# Altium PCB CROSS.PcbDoc
Units mm, origin at the board's own origin, x right, y up, seen from the top; angles counter-clockwise.
Board outline 150.9 x 121.4 mm, 2 copper layers (Top Layer, Bottom Layer); 17 components, 49 nets, 155 pads, 10 vias.
Unrouted connection lines stored in the file: 3.
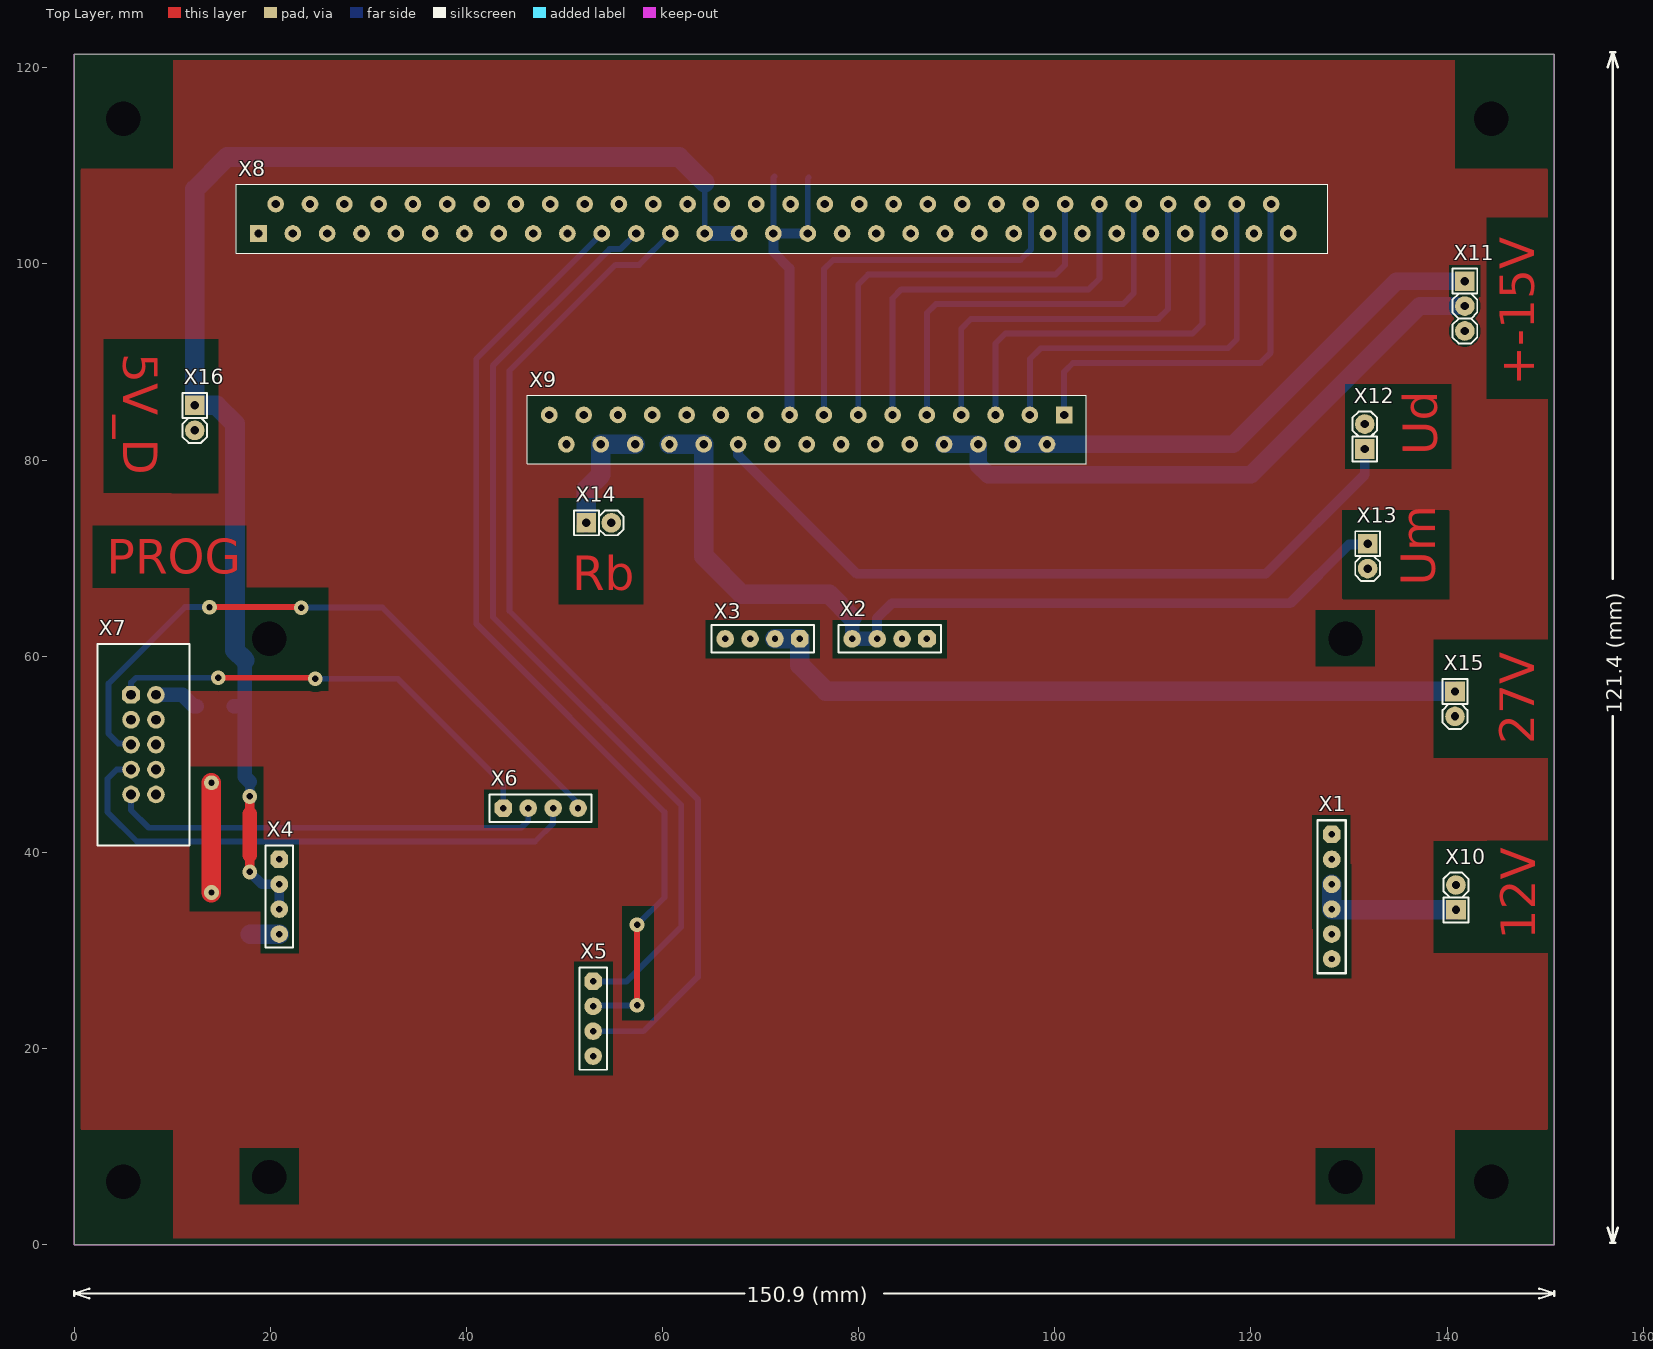
[diagram p0: Top Layer view]
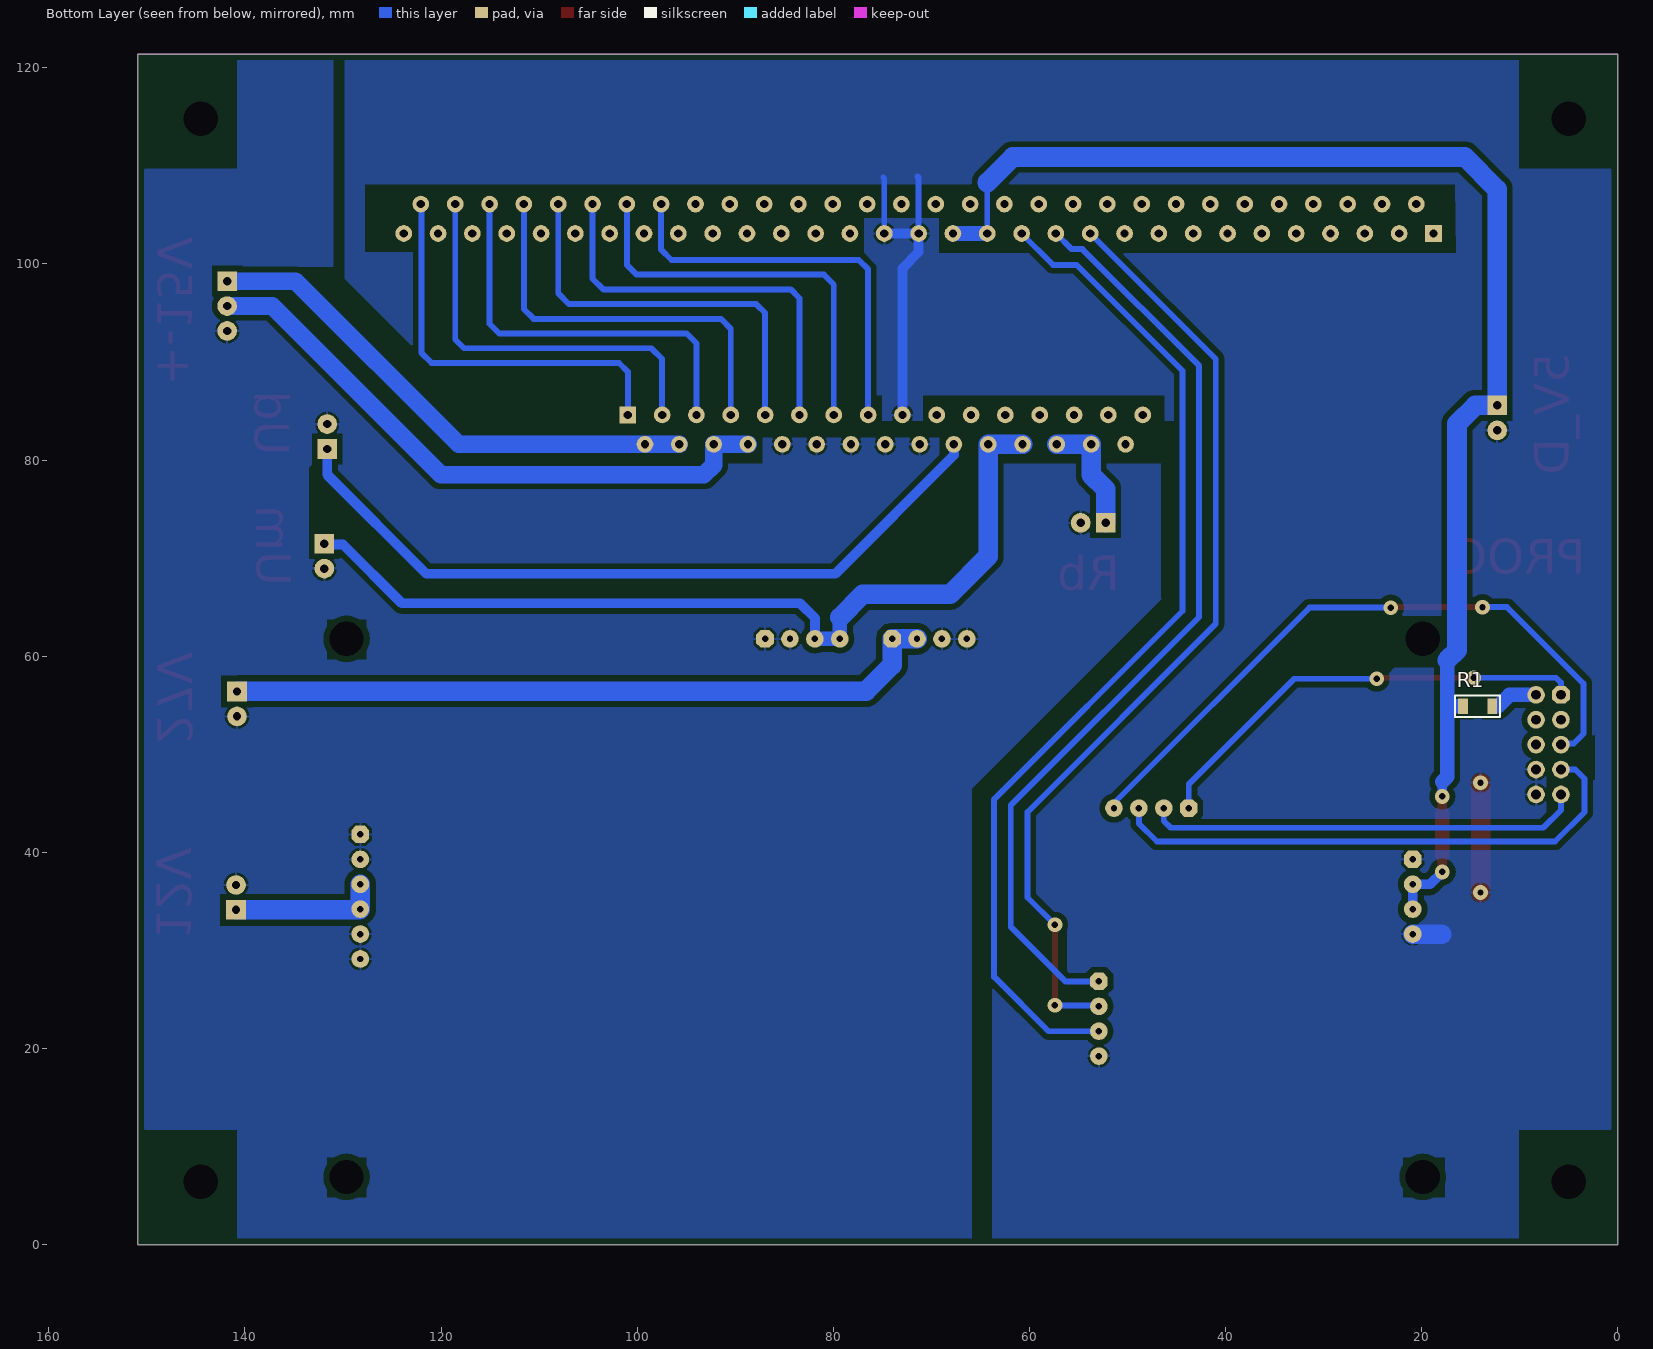
[diagram p1: Bottom Layer view, seen from below]
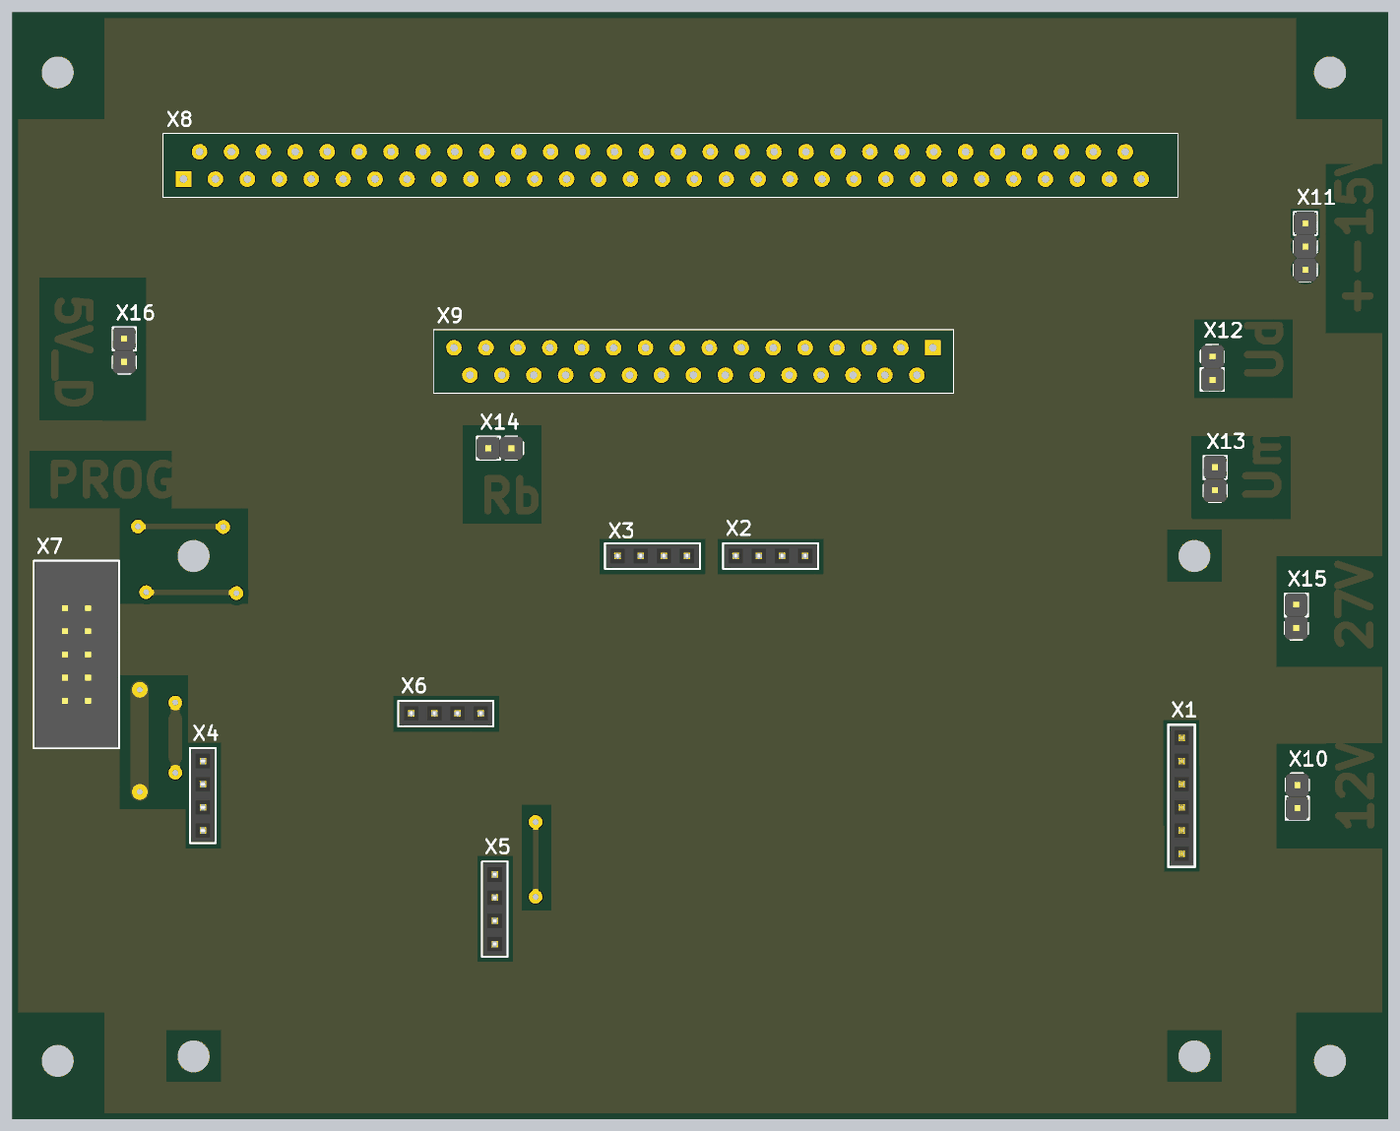
[diagram p2: 3D render of the assembled board from above, using the file's embedded part models]

## Layer stack, top to bottom
Top Solder: solder mask 0.0102, Solder Resist, Dk 3.5
Top Layer: signal copper 0.0356
Dielectric 1: dielectric 0.32, FR-4, Dk 4.8
Bottom Layer: signal copper 0.0356
Bottom Solder: solder mask 0.0102, Solder Resist, Dk 3.5

## Board outline
0,0 0,121.4 150.9,121.4 150.9,0

## Design rules (kind name [scope] priority, off if disabled: settings)
Clearance [All] p1: gap=0.6 ignorepadtopadclearanceinfootprint=TRUE except(0.4: Arc-THPad Track-THPad SMDPad-THPad THPad-THPad)
PolygonConnect [All] p1: connectstyle=Relief reliefconductorwidth=0.254 reliefentries=4 polygonreliefangle="90 Angle" airgapwidth=0.254
RoutingVias [All] p1: holewidth=0.711 width=1.27 viastyle="Through Hole" minholewidth=0.711 minwidth=1.27 maxholewidth=0.711 maxwidth=1.27
SolderMaskExpansion [All] p1: expansion=0.102
Width [All] p1: maxlimit=5 minlimit=0.254 preferedwidth=0.6
30 further rules are at their usual default settings.

## Classes and differential pairs
component class DAC: C1 C2 C3 C4 C5 C6 C7 C12 C13 C14 C23

## Components (designator, comment, footprint, x,y, rotation, side; value= is the part's Value field where it differs from the comment)
R1 "Comment" CH1206R 14.3,54.9 r180 bottom
X1 "Comment" "CON: PBS-6" 128.231,35.475 r270 top
X2 "Comment" "CON: PBS-4" 83.146,61.764 r180 top
X3 "Comment" "CON: PBS-4" 70.192,61.764 r180 top
X4 "Comment" "CON: PBS-4" 20.916,35.475 r270 top
X5 "Comment" "CON: PBS-4" 52.92,23.029 r270 top
X6 "Comment" "CON: PBS-4" 47.57,44.5 r0 top
X7 "Connector, 10pin, 2.54mm, 250VAC, 3A" "CON: IDC-10MS" 7.07,50.98 r270 top
X8 "USB" GRPM61_socket 20.55,106.1 r0 top
X9 "Comment" GRPM31_socket 99.2,81.6 r180 top
X10 "Connector, 2pin, 2.54mm, 500VAC, 3A" "CON: PLS-2" 140.9,35.4 r90 top
X11 "Connector, 3pin, 2.54mm, 500VAC, 3A" "CON: PLS-3" 141.8,95.7 r270 top
X12 "Connector, 2pin, 2.54mm, 500VAC, 3A" "CON: PLS-2" 131.6,82.4 r90 top
X13 "Connector, 2pin, 2.54mm, 500VAC, 3A" "CON: PLS-2" 131.9,70.2 r270 top
X14 "Connector, 2pin, 2.54mm, 500VAC, 3A" "CON: PLS-2" 53.5,73.6 r0 top
X15 "Connector, 2pin, 2.54mm, 500VAC, 3A" "CON: PLS-2" 140.8,55.13 r270 top
X16 "Connector, 2pin, 2.54mm, 500VAC, 3A" "CON: PLS-2" 12.3,84.3 r270 top

## Footprints (in the part's own frame and the unit in brackets; to place one, negate y for a bottom-side part, rotate by r counter-clockwise, add the part's x,y. Pads: shape width x height; smd on the part's side, far side on the other; paste and mask are expansions set on the pad)
CH1206R [mm] "Chip Resistor, 2-Leads, Body 3,0x1,5mm, IPC Low Density"
  rect 1x1.6 smd: 1(-1.5,0) 2(1.5,0)
  silkscreen extent -2.3,-1.1 2.3,1.1, body extent -1.65,-0.8 1.55,0.8, height 0.47
"CON: IDC-10MS" [mm] "IDC-10MS 10 pin PCB-mount header"
  oct 1.8x1.8 hole 1: 1(-5.08,-1.27)
  round 1.8 hole 1: 2(-5.08,1.27) 3(-2.54,-1.27) 4(-2.54,1.27) 5(0,-1.27) 6(0,1.27) 7(2.54,-1.27) 8(2.54,1.27) 9(5.08,-1.27) 10(5.08,1.27)
  round 0.5 on Mech1: ""(-9.6,-4)
  round 0.5 on Top Overlay: ""(-9.6,-4)
  silkscreen extent -10.28,-4.7 10.3,4.67, body extent -10.14,-4.57 10.16,4.53, height 9
"CON: PBS-4" [mm] "PBS-5"
  oct 1.8x1.8 hole 0.65: 1(-3.81,0)
  round 1.8 hole 0.65: 2(-1.27,0) 3(1.27,0) 4(3.81,0)
  silkscreen extent -5.23,-1.4 5.2,1.4, body extent -5.08,-1.27 5.08,1.27, height 8.4
"CON: PBS-6" [mm] "PBS-6"
  oct 1.8x1.8 hole 0.65: 1(-6.35,0)
  round 1.8 hole 0.65: 2(-3.81,0) 3(-1.27,0) 4(1.27,0) 5(3.81,0) 6(6.35,0)
  silkscreen extent -7.8,-1.45 7.8,1.45, body extent -7.62,-1.27 7.62,1.27, height 8.4
"CON: PLS-2" [mm]
  rect 2x2 hole 0.85: 1(-1.27,0)
  round 2 hole 0.85: 2(1.27,0)
  silkscreen extent -2.54,-1.27 2.54,1.27, body extent -2.57,-1.28 2.51,1.26, height 8.54
"CON: PLS-3" [mm]
  rect 2x2 hole 0.85: 1(-2.54,0)
  round 2 hole 0.85: 2(0,0) 3(2.54,0)
  silkscreen extent -3.81,-1.27 3.81,1.27, body extent -3.81,-1.27 3.81,1.27, height 8.54
GRPM31_socket [mm]
  round 1.7 hole 0.85: A1(0,0) A2(3.5,0) A3(7,0) A4(10.5,0) A5(14,0) A6(17.5,0) A7(21,0) A8(24.5,0) A9(28,0) A10(31.5,0) A11(35,0) A12(38.5,0) A13(42,0) A14(45.5,0) A15(49,0) B2(1.75,-3) B3(5.25,-3) B4(8.75,-3) B5(12.25,-3) B6(15.75,-3) B7(19.25,-3) B8(22.75,-3) B9(26.25,-3) B10(29.75,-3) B11(33.25,-3) B12(36.75,-3) B13(40.25,-3) B14(43.75,-3) B15(47.25,-3) B16(50.75,-3)
  rect 1.7x1.7 hole 0.85: B1(-1.75,-3)
  silkscreen extent -4,-5 53,2
GRPM61_socket [mm]
  round 1.7 hole 0.85: A1(0,0) A2(3.5,0) A3(7,0) A4(10.5,0) A5(14,0) A6(17.5,0) A7(21,0) A8(24.5,0) A9(28,0) A10(31.5,0) A11(35,0) A12(38.5,0) A13(42,0) A14(45.5,0) A15(49,0) A16(52.5,0) A17(56,0) A18(59.5,0) A19(63,0) A20(66.5,0) A21(70,0) A22(73.5,0) A23(77,0) A24(80.5,0) A25(84,0) A26(87.5,0) A27(91,0) A28(94.5,0) A29(98,0) A30(101.5,0) B2(1.75,-3) B3(5.25,-3) B4(8.75,-3) B5(12.25,-3) B6(15.75,-3) B7(19.25,-3) B8(22.75,-3) B9(26.25,-3) B10(29.75,-3) B11(33.25,-3) B12(36.75,-3) B13(40.25,-3) B14(43.75,-3) B15(47.25,-3) B16(50.75,-3) B17(54.25,-3) B18(57.75,-3) B19(61.25,-3) B20(64.75,-3) B21(68.25,-3) B22(71.75,-3) B23(75.25,-3) B24(78.75,-3) B25(82.25,-3) B26(85.75,-3) B27(89.25,-3) B28(92.75,-3) B29(96.25,-3) B30(99.75,-3) B31(103.25,-3)
  rect 1.7x1.7 hole 0.85: B1(-1.75,-3)
  silkscreen extent -4,-5 107.26,2

## Part data
X7: library part IDC-10, CurrentMax=3A, Manufacturer=Connfly, VoltageMax=250VAC, CommentText=IDC, HelpURL=https://www.chipdip.ru/product/idc-10ms, Multichannel=10pin, PartNumber=IDC-10, Pitch=2.54mm, TypeConnector=Connector, ValueManufacturerPartNumber="Connector, 10pin, 2.54mm, 250VAC, 3A"
X8: library part Component_1
X10 X12 X13 X14 X15 X16: library part PLS-2, CurrentMax=3A, Manufacturer=Connfly, VoltageMax=500VAC, HelpURL=https://www.chipdip.ru/product/pls-2, Multichannel=2pin, PartNumber=PLS-2, Pitch=2.54mm, TypeConnector=Connector, ValueManufacturerPartNumber="Connector, 2pin, 2.54mm, 500VAC, 3A"
  X10: CommentText=12V
  X12: CommentText=Ud
  X13: CommentText=Uout
  X14: CommentText=Rb
  X15: CommentText=27V
  X16: CommentText=5V*
X11: library part PLS-3, CurrentMax=3A, Manufacturer=Connfly, VoltageMax=500VAC, CommentText="+15V -15V", HelpURL=https://www.chipdip.ru/product/pls-3, Multichannel=3pin, PartNumber=PLS-3, Pitch=2.54mm, TypeConnector=Connector, ValueManufacturerPartNumber="Connector, 3pin, 2.54mm, 500VAC, 3A"

## Free pads (board coordinates)
  round 3 hole 3.5: 3(19.9,6.9) 3(19.9,61.764) 3(129.628,6.9) 3(129.628,61.764) 4(5,6.4) 4(5,114.8) 4(144.5,6.4) 4(144.5,114.8)

## Via types
v1: diameter 1.5, hole 0.65, Top Layer to Bottom Layer, 10 vias

## Nets (pads, with @x,y where several pads share a name; then routed paths per layer and width w, separated by ;. In a path a pad name is that pad's centre, name@x,y a point inside that pad or via, vN(x,y) a via of type N, cw(c..) or ccw(c..) an arc to the next point about the centre after c; other vN are vias at no path point)
+5.1V: 
+5V*: R1.1 R1.2 X4.2 X4.3 X7.2 X8.B14 X8.B15 X16.1 | length 148.5
  Top Layer w1: v1(17.9,38) 17.9,39.7 ; 17.9,43.9 v1(17.9,45.7)
  Top Layer w1.5: 17.9,39.7 17.9,43.9
  Bottom Layer w0.6: X4.2@20.258,36.745 X4.2 ; X8.B14 64.3,108.3
  Bottom Layer w1: v1(17.9,38) 19.155,36.745 X4.2@20.258,36.745 ; v1(17.9,45.7) 17.9,47.2 ; X4.3 X4.2
  Bottom Layer w1.5: X7.2 11.04,56.06 12.2,54.9 R1.2@12.5,54.9 ; 16.3,54.9 17.4,54.9 ; 17.4,59.6 17.4,56.5 17.4,54.9 ; 17.9,47.2 17.4,47.7 17.4,54.9 ; X8.B14 X8.B15
  Bottom Layer w2: 17,110.9 61.7,110.9 64.3,108.3 ; 17.3,110.9 15.6,110.9 12.3,107.6 X16.1 14.53,85.57 16.4,83.7 16.4,60.6 17.4,59.6
+12V: X1.3 X1.4 X10.1 | length 15.2
  Bottom Layer w2: X1.3 X1.4 128.306,34.13 X10.1
+15V: X9.A1 X9.A2 X11.1 | length 53
  Bottom Layer w1.8: X9.A2 X9.A1 118.2,81.6 134.84,98.24 X11.1
+27V: X3.1 X3.2 X15.1 | length 73
  Bottom Layer w2: X3.2 X3.1 74.002,59.098 76.67,56.43 X15.1@140.7,56.43
-15V: X9.A3 X9.A4 X11.2 | length 62.7
  Bottom Layer w1.8: X9.A4 X9.A3 92.2,79.5 93.2,78.5 120,78.5 137.2,95.7 X11.2
ADUM_EN1: 
ADUM_EN2: 
AGND: X1.1 X1.2 X1.5 X1.6 X2.1 X2.2 X3.3 X3.4 X9.A5 X9.A6 X9.A7 X9.A8 X9.A9 X10.2 X11.3 X12.2 X13.2 X14.2 X15.2
C1: 
C2: 
CS_MCU: X5.3 X8.B13 | length 104.9
  Bottom Layer w0.6: X5.3 58.059,21.759 63.6,27.3 63.6,45.4 44.4,64.6 44.4,89.1 55.2,99.9 57.6,99.9 X8.B13
DGND: X4.1 X4.4 X5.4 X7.8 X7.10 X8.B16 X8.B17 X9.B9 X16.2 | length 48.4
  Top Layer w2: v1(14,35.9) v1(14,47.1)
  Bottom Layer w0.6: X8.B16 71.3,108.8 71.4,108.9 ; X8.B17 74.8,108.7 74.9,108.8
  Bottom Layer w1: X9.B9 72.95,99.55 71.3,101.2 X8.B16 X8.B17
  Bottom Layer w2: 17.965,31.665 X4.4
DVDD: 
M0: X8.A30 X9.B1 | length 41.4
  Bottom Layer w0.6: X9.B1 100.95,89 101.85,89.9 120.95,89.9 122,90.95 X8.A30@122,106.1
M1: X8.A29 X9.B2 | length 41.4
  Bottom Layer w0.6: X9.B2 97.45,90.3 98.55,91.4 117.65,91.4 118.55,92.3 X8.A29
M2: X8.A28 X9.B3 | length 41.4
  Bottom Layer w0.6: X9.B3 93.95,91.9 94.95,92.9 114.05,92.9 115.05,93.9 X8.A28
M3: X8.A27 X9.B4 | length 41.4
  Bottom Layer w0.6: X9.B4 90.45,93.4 91.45,94.4 110.55,94.4 111.55,95.4 X8.A27
M4: X8.A26 X9.B5 | length 41.4
  Bottom Layer w0.6: X9.B5 86.95,95 87.85,95.9 106.95,95.9 108.05,97 X8.A26
M5: X8.A25 X9.B6 | length 41.4
  Bottom Layer w0.6: X9.B6 83.45,96.5 84.35,97.4 103.45,97.4 104.55,98.5 X8.A25
M6: X8.A24 X9.B7 | length 41.4
  Bottom Layer w0.6: X9.B7 79.95,97.9 80.95,98.9 100.05,98.9 101.05,99.9 X8.A24
M7: X8.A23 X9.B8 | length 41.4
  Bottom Layer w0.6: X9.B8 76.45,99.45 77.4,100.4 96.5,100.4 97.55,101.45 X8.A23
MISO: X6.2 X7.9 | length 44.4
  Bottom Layer w0.6: X7.9 5.8,44.3 7.6,42.5 45.6,42.5 46.3,43.2 X6.2
MOSI: X5.2 X6.1 X7.1 X8.B11 | length 144
  Top Layer w0.6: v1(14.7,57.8) 24.5,57.8 v1(24.6,57.7) ; v1(57.4,24.4) v1(57.4,32.6)
  Bottom Layer w0.6: X7.1 5.8,57.3 6.3,57.8 v1(14.7,57.8) ; v1(24.6,57.7) 33,57.7 43.76,46.94 X6.1 ; X5.2 53.021,24.4 v1(57.4,24.4) ; X8.B11 41,90.3 41,63.3 60.2,44.1 60.2,35.4 v1(57.4,32.6)
NetC16_1: 
NetC20_1: 
NetR2_1: 
NetR4_1: 
NetR6_1: 
NetR7_1: 
NetR9_2: 
NetR10_2: 
NetR11_2: 
NetR12_1: 
NetR12_2: 
Rb: X9.A13 X9.A14 X14.1 | length 12.1
  Bottom Layer w2: X14.1 52.23,77.03 53.7,78.5 X9.A14 X9.A13
RESET: X6.4 X7.5 | length 67.8
  Top Layer w0.6: v1(13.8,65) 23.1,65 v1(23.15,64.95)
  Bottom Layer w0.6: X7.5 5.68,51.1 4.5,51.1 3.5,52.1 3.5,57.2 11.3,65 v1(13.8,65) ; v1(23.15,64.95) 31.45,64.95 51.38,45.02 X6.4
SCK: X5.1 X6.3 X7.7 X8.B12 | length 151.8
  Bottom Layer w0.6: X7.7 4.34,48.44 3.4,47.5 3.4,44.1 6.4,41.1 47,41.1 48.84,42.94 X6.3 ; X5.1 56.339,26.839 61.9,32.4 61.9,44.8 42.7,64 42.7,89.6 54.6,101.5 55.7,101.5 X8.B12
SCLK_IN: 
SCLK_OUT: 
SDIO_IN: 
SDIO_OUT: 
Ud: X9.A10 X12.1 | length 76.8
  Bottom Layer w1: X9.A10 67.7,80.5 79.8,68.4 121.5,68.4 131.6,78.5 X12.1
Uout: X2.3 X2.4 X9.A11 X9.A12 X13.1 | length 92.6
  Bottom Layer w1: X2.3 81.876,63.876 83.4,65.4 124,65.4 130,71.4 X13.1@131.9,71.4
  Bottom Layer w1.5: 79.336,63.964 X2.4 X2.3
  Bottom Layer w2: X9.A12 X9.A11 64.2,70.2 68.1,66.3 77,66.3 79.336,63.964
VREF: 
XIN: 
XOUT: 
XTAL1: 
XTAL2: 
pads on no net: X7. X7.3 X7.4 X7.6 X8.A1 X8.A2 X8.A3 X8.A4 X8.A5 X8.A6 X8.A7 X8.A8 X8.A9 X8.A10 X8.A11 X8.A12 X8.A13 X8.A14 X8.A15 X8.A16 X8.A17 X8.A18 X8.A19 X8.A20 X8.A21 X8.A22 X8.B1 X8.B2 X8.B3 X8.B4 X8.B5 X8.B6 X8.B7 X8.B8 X8.B9 X8.B10 X8.B18 X8.B19 X8.B20 X8.B21 X8.B22 X8.B23 X8.B24 X8.B25 X8.B26 X8.B27 X8.B28 X8.B29 X8.B30 X8.B31 X9.A15 X9.B10 X9.B11 X9.B12 X9.B13 X9.B14 X9.B15 X9.B16

## Polygon pours and split planes (outlines as drawn)
AGND on Bottom Layer "AGND_BOT" (solid, remove dead copper, pour order 2): 150.8,121.17 150.8,-0.23 65.9,-0.23 65.9,46.47 46.5,65.87 46.6,65.97 46.6,82.27 115.4,82.27 131,97.87 131,121.17
DGND on Bottom Layer "DGND_BOT" (solid, remove dead copper, pour order 4): -1.5,-0.1 63.8,-0.1 63.8,40 40.6,63.2 40.6,84 115.3,84 129.8,98.5 129.8,121.3 -1.5,121.3
no net on Top Layer "TL" (solid, pour order 6): 0,121.4 150.9,121.4 150.9,0 0,0

## Keep-outs
Keep-Out Layer:
  the board outline again, w0.1

## Other copper
Top Layer:
  pour cut-out: 0.7,0.6 10.1,0.6 10.1,11.7 0.7,11.7
  pour cut-out: 150.2,0.6 140.8,0.6 140.8,11.7 150.2,11.7
  pour cut-out: 150.2,120.8 140.8,120.8 140.8,109.7 150.2,109.7
  pour cut-out: 0.7,120.8 10.1,120.8 10.1,109.7 0.7,109.7
  pour cut-out: 16.5,108.1 127.8,108.1 127.8,101.1 16.5,101.1
  pour cut-out: 46.2,86.6 46.2,79.6 103.2,79.6 103.2,86.6
  pour cut-out: 58.031,71.599 58.031,76.1 49.4,76.1 49.4,71.599
  pour cut-out: 134.101,87.731 129.6,87.731 129.6,79.1 134.101,79.1
  pour cut-out: 140.2,65.8 140.2,74.8 140.1,74.9 129.3,74.9 129.3,65.9 129.4,65.8
  pour cut-out: 144.001,61.73 138.63,61.73 138.6,61.7 138.6,49.6 144.001,49.6
  pour cut-out: 144.101,41.247 144.054,41.2 138.6,41.2 138.6,29.7 138.7,29.7 144.101,29.7
  pour cut-out: 9.899,92.3 14.7,92.3 14.7,76.6 9.97,76.6 9.899,76.671
  pour cut-out: 2.4,40.7 11.8,40.7 11.8,61.1 11.7,61.2 2.4,61.2
  pour cut-out: 41.8,42.5 41.8,46.4 53.4,46.4 53.4,42.5
  pour cut-out: 22.916,29.705 19.016,29.705 19.016,41.305 22.916,41.305
  pour cut-out: 54.92,17.259 51.02,17.259 51.02,28.859 54.92,28.859
  pour cut-out: 77.376,59.764 77.376,63.664 88.976,63.664 88.976,59.764
  pour cut-out: 64.422,59.764 64.422,63.664 76.022,63.664 76.022,59.764
  pour cut-out: 126.231,43.785 130.131,43.785 130.131,32.185 126.231,32.185
  pour cut-out: 130.231,27.165 126.331,27.165 126.331,38.765 130.231,38.765
  pour cut-out: 11.8,48.701 11.801,48.7 19.3,48.7 19.3,34.2 19.1,34 11.8,34
  pour cut-out: 11.8,67 11.8,56.464 11.836,56.5 25.9,56.5 25.9,67
  pour cut-out: 59.1,34.5 55.9,34.5 55.9,22.9 59.1,22.9
  pour cut-out: 22.9,9.8 16.9,9.8 16.9,4.1 22.9,4.1
  pour cut-out: 8,9.3 2,9.3 2,3.6 8,3.6
  pour cut-out: 132.628,9.8 126.628,9.8 126.628,4.1 132.628,4.1
  pour cut-out: 147.5,9.3 141.5,9.3 141.5,3.6 147.5,3.6
  pour cut-out: 132.628,64.664 126.628,64.664 126.628,58.964 132.628,58.964
  pour cut-out: 147.5,117.7 141.5,117.7 141.5,112 147.5,112
  pour cut-out: 8,117.7 2,117.7 2,112 8,112
  pour cut-out: 22.9,64.664 16.9,64.664 16.9,58.964 22.9,58.964
  text "5V_D" at 5,90.9 h3.5 r270
  text "+-15V" at 148.9,87.6 h3.5 r90
  text "Ud" at 139,80.5 h3.5 r90
  text "PROG" at 3.3,68.4 h3.5
  text "Um" at 138.8,67.2 h3.5 r90
  text "Rb" at 50.8,66.7 h3.5
  text "27V" at 148.9,51 h3.5 r90
  text "12V" at 149,31.1 h3.5 r90
Bottom Layer:
  pour cut-out: 150.2,120.8 140.8,120.8 140.8,109.7 150.2,109.7
  pour cut-out: 150.2,0.6 140.8,0.6 140.8,11.7 150.2,11.7
  pour cut-out: 0.7,0.6 10.1,0.6 10.1,11.7 0.7,11.7
  pour cut-out: 0.7,120.8 10.1,120.8 10.1,109.7 0.7,109.7
  pour cut-out: 16.6,108.1 127.8,108.1 127.8,101.1 127.7,101.2 76.849,101.2 76.849,104.653 69.253,104.653 69.251,101.1 16.5,101.1
  pour cut-out: 46.2,86.6 46.2,83.6 70.9,83.6 70.9,86.6
  pour cut-out: 75,83.6 75,86.6 103.2,86.6 103.2,83.6
  pour cut-out: 46.2,79.6 46.2,83 69.2,83 69.2,79.6
  pour cut-out: 87.2,83 87.2,79.6 103.2,79.6 103.2,83
  pour cut-out: 2.3,47.3 2.3,52.1 3.9,50.5 4.6,50.5 5.2,49.9 5,49.7 5,49.3 4.4,49.3 3.7,48.6
  pour cut-out: 7.3,48.4 7.3,43.7 7.2,43.7 6.5,44.4 6.5,48.3
  pour cut-out: 134.84,99.741 134.799,99.7 130.5,99.7 130.5,98.1 115.3,82.9 102.9,82.9 102.9,81.9 100.7,79.7 101.9,78.5 113.5,78.5 114,79
  pour cut-out: 53.7,26.1 53.9,26.3 56.7,26.3 62.8,32.4 62.9,32.3 62.9,27.4 57.8,22.3 53.47,22.3
  pour cut-out: 56.164,32.6 56.164,27.938 61.126,32.9 61.2,32.9 61.2,35.1 60.1,34 58.8,34
  pour cut-out: 17.8,64.1 31.5,64.1 49.3,46.3 49.3,45.8 48.7,45.8 48,45.1 47.2,45.1 46.6,45.7 45.8,45.7 45.3,45.2 44.9,45.6 44.4,45.6 44.4,47.1 34.7,56.8 24.708,56.8
  pour cut-out: 13.3,58.5 13.3,59 13,59.3 6.4,59.3 6.4,59 5.9,58.5 6.1,58.3 9,58.3
  pour cut-out: 76.8,86.6 77.1,86.9 77.1,101.1 122.801,101.1 122.6,100.899 122.6,90.2 121.85,89.45 115.8,83.4 102.9,83.4
  pour cut-out: 127.6,8.836 131.6,8.836 131.6,4.836 127.6,4.836
  pour cut-out: 17.672,8.836 21.872,8.836 21.872,4.836 17.672,4.836
  pour cut-out: 127.6,63.7 131.6,63.7 131.6,59.7 127.6,59.7
  pour cut-out: 17.3,64.1 23.1,64.1 23.1,58.8 17.3,58.8
  pour cut-out: 12,57.1 15,57.1 15.9,58 16.3,57.6 16.3,56.2 16.4,56.1 16,55.7 15.3,55.7 15.3,53.6 15.2,53.5 15.1,53.6 12,53.6
  pour cut-out: 65.4,80 65.4,70.8 65.5,70.8 69,67.3 77.7,67.3 77.7,67.2 80.7,64.2 82.7,66.2 123.7,66.2 130.57,73.07 133.5,73.07 133.5,79.23 133.13,79.6 132.3,79.6 132.3,79 121.5,68.2 78.4,68.2 66.7,79.9

## Silkscreen, mask and mechanical layers (free items; w line width, h text height)
Top Overlay:
  lines w0.254: 0.031,-5.24 0.031,-4.732 ; 1.555,-5.494 0.031,-4.986 ; 1.555,-4.478 0.031,-4.986 ; 68.346,-4.986 0.031,-4.986 ; 82.616,-4.986 150.931,-4.986 ; 149.407,-5.494 150.931,-4.986 ; 149.407,-4.478 150.931,-4.986 ; 150.931,-5.24 150.931,-4.732 ; 156.392,1.716 156.9,0.192 ; 156.392,120.068 156.9,121.592 ; 156.646,0.192 157.154,0.192 ; 156.646,121.592 157.154,121.592 ; 156.9,53.883 156.9,0.192 ; 156.9,67.9 156.9,121.592 ; 157.408,1.716 156.9,0.192 ; 157.408,120.068 156.9,121.592
  text "121.4 (mm)" at 157.814,54.137 h1.52 r90
  text "150.9 (mm)" at 68.6,-5.9 h1.52